# Altium PCB Xplorer_Camera.PcbDoc
Units mil, origin at the board's own origin, x right, y up, seen from the top; angles counter-clockwise.
Board outline 3270 x 2050 mil, 2 copper layers (Top Layer, Bottom Layer); 34 components, 38 nets, 138 pads, 656 vias.
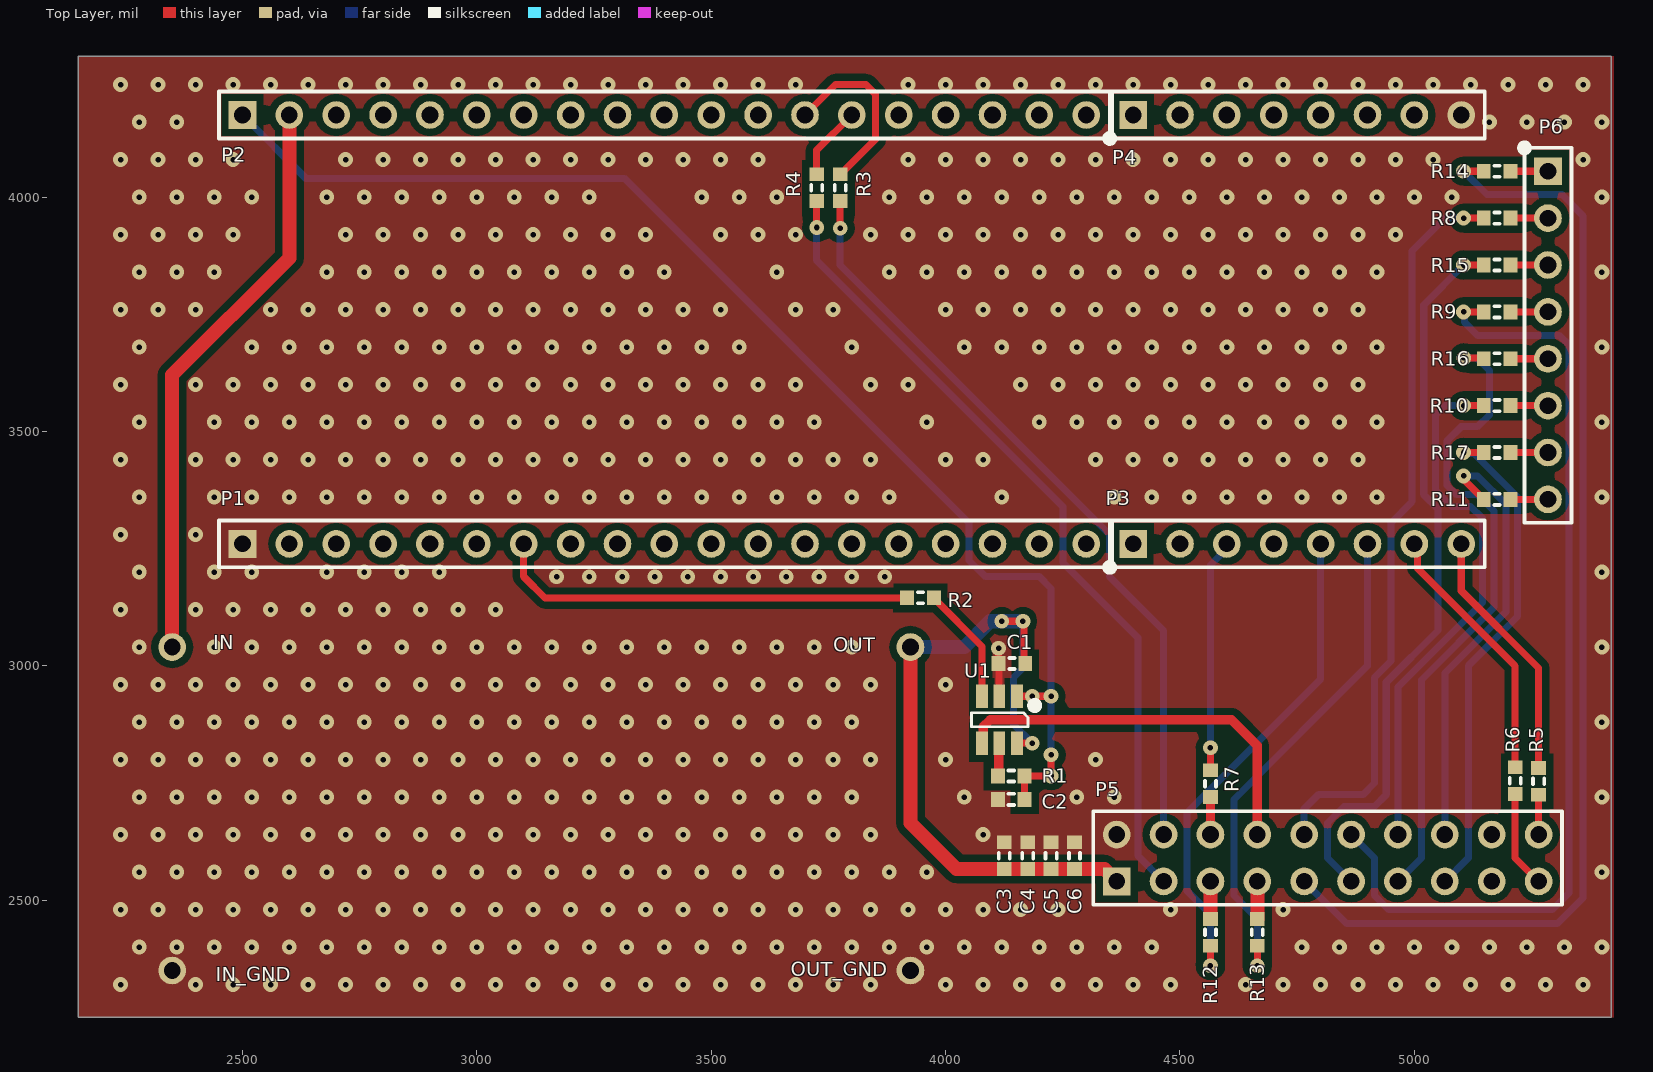
[diagram p0: Top Layer view]
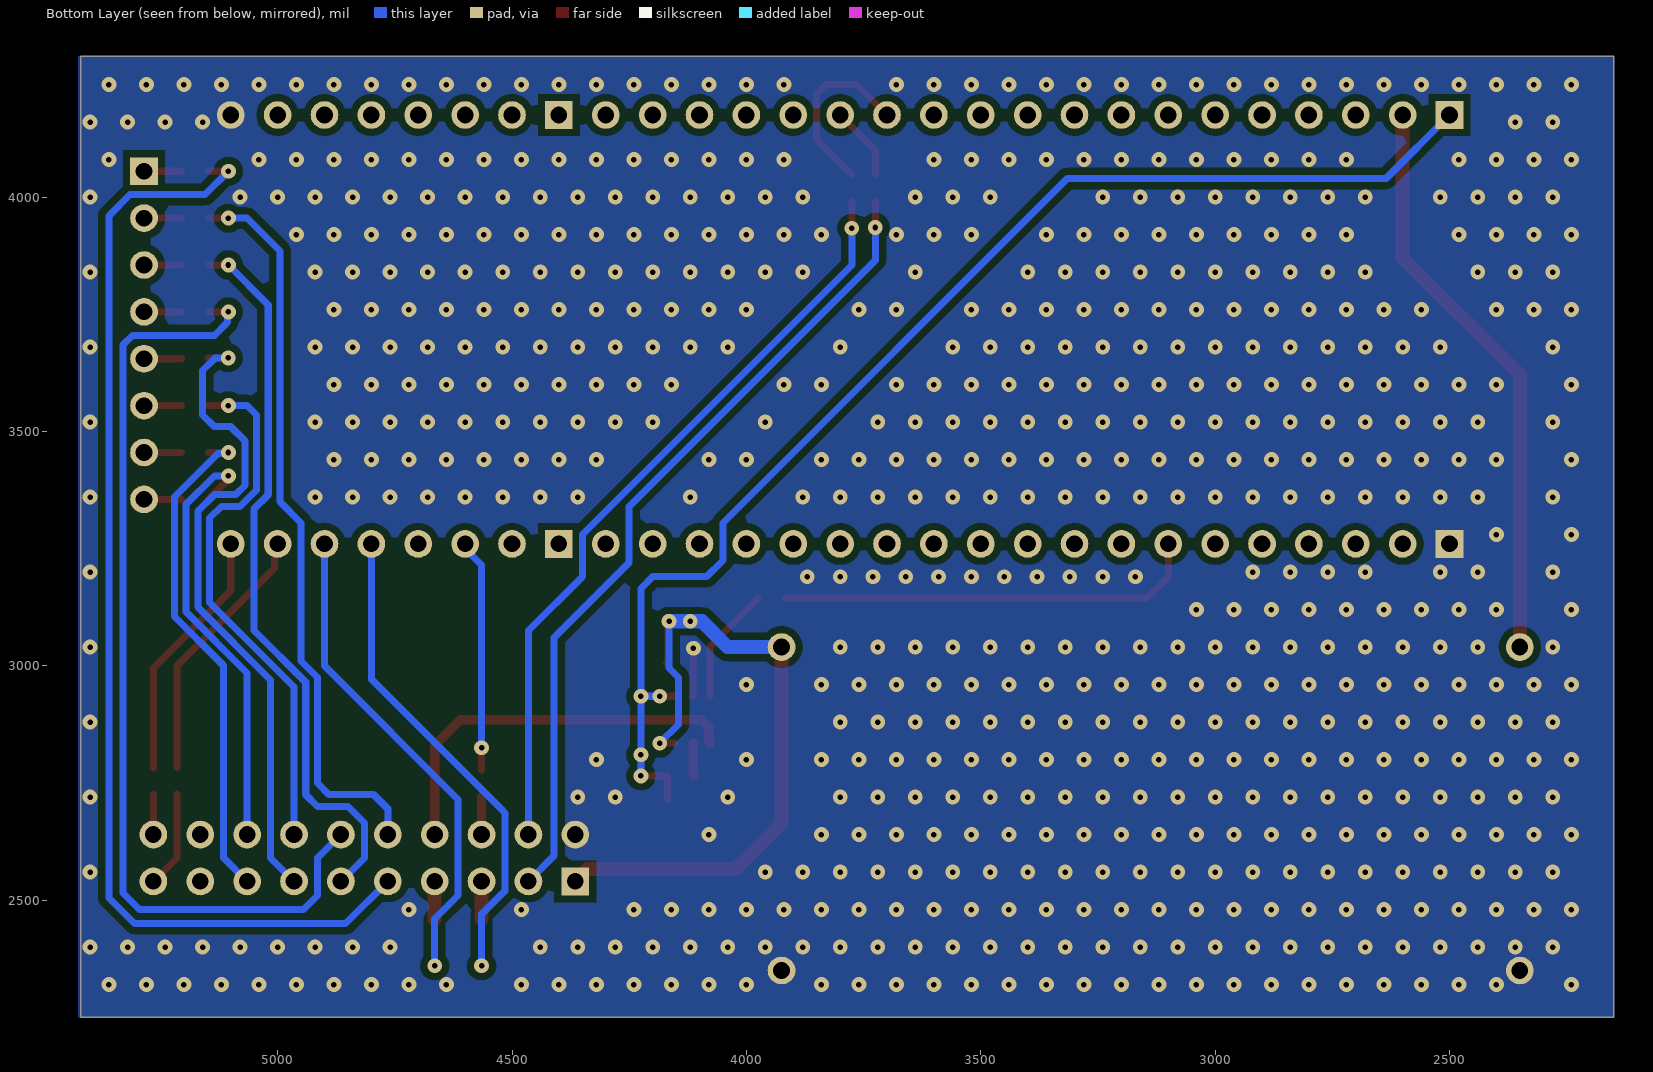
[diagram p1: Bottom Layer view, seen from below]
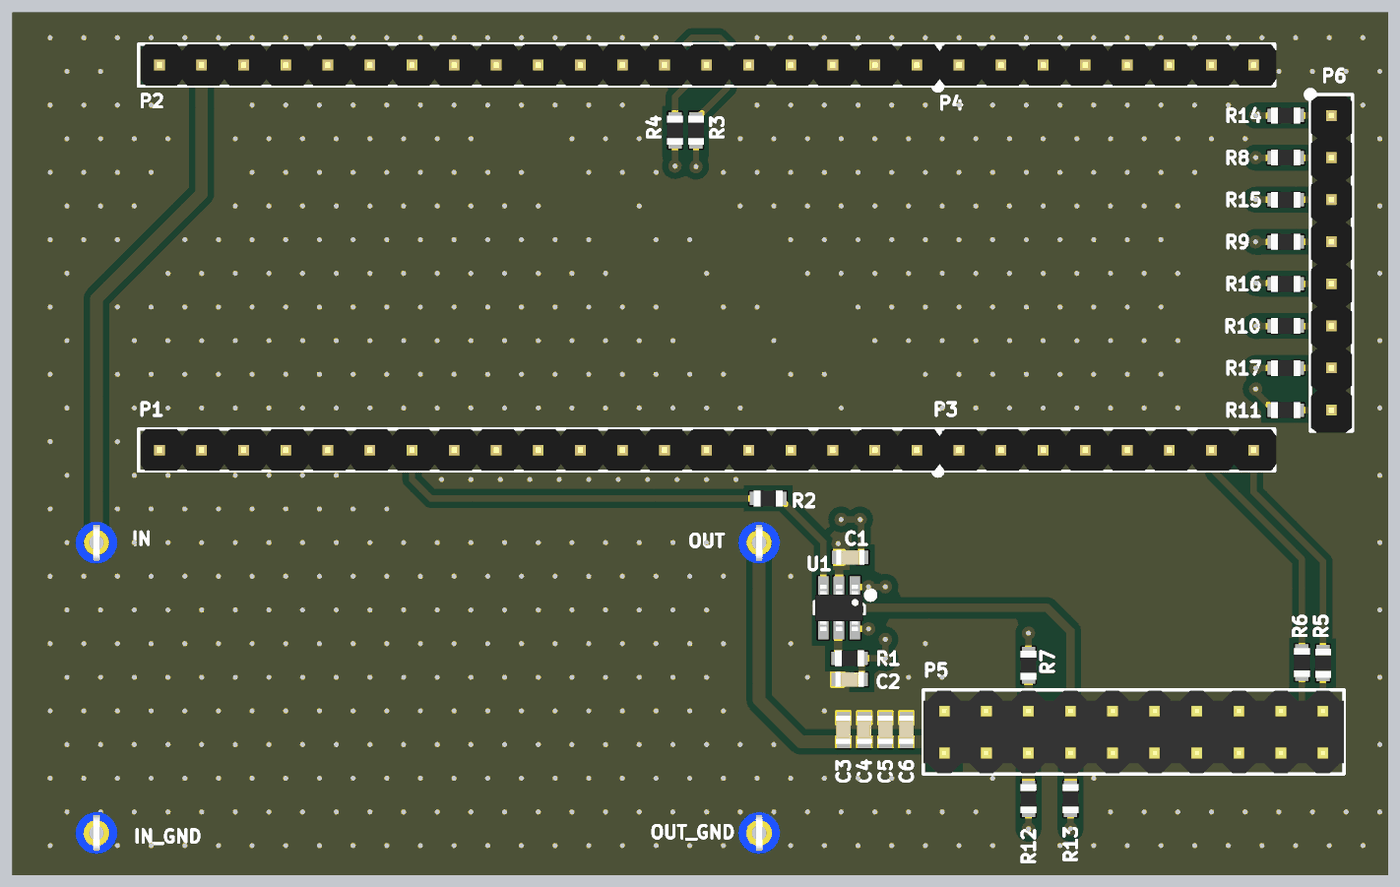
[diagram p2: 3D render of the assembled board from above, using the file's embedded part models]

## Layer stack, top to bottom
Top Solder: solder mask 0.4, Solder Resist, Dk 3.5
Top Layer: signal copper 1.4
Dielectric 1: dielectric 12.6, FR-4, Dk 4.8
Bottom Layer: signal copper 1.4
Bottom Solder: solder mask 0.4, Solder Resist, Dk 3.5

## Board outline
2150,2250 5420,2250 5420,4300 2150,4300

## Design rules (kind name [scope] priority, off if disabled: settings)
Clearance [All] p1: gap=6 ignorepadtopadclearanceinfootprint=FALSE except(15: Arc-Poly Track-Poly SMDPad-Poly THPad-Poly Via-Poly Fill-Poly Poly-Poly Poly-Region Poly-Text Poly-Hole)
ComponentClearance P1_P3 [All] p1: gap=-1 collisioncheckmode=3 verticalgap=10 showdistances=FALSE
ComponentClearance P2_P4 [InComponent('P2') vs InComponent('P4')] p2: gap=-1 collisioncheckmode=3 verticalgap=0 showdistances=FALSE
ComponentClearance [All] p3: gap=10 collisioncheckmode=3 verticalgap=10 showdistances=FALSE
DiffPairsRouting [All] p1: maxlimit=10 minlimit=6 mostfreqgap=6 toplayer_minwidth=7 toplayer_maxwidth=15 toplayer_prefwidth=7 bottomlayer_minwidth=7 bottomlayer_maxwidth=15 bottomlayer_prefwidth=7 maxuncoupledlength=500
FabricationTestPointUsage TestPointUsage [All] p1: valid=0 allowmultiple=FALSE
FabricationTestpoint Testpoint [All] p1: side=3 testpointundercomponent=TRUE minsize=40 maxsize=100 preferedsize=60 minholesize=20 maxholesize=40 preferedholesize=32 testpointgrid=1 allowsidetop=TRUE allowsidebottom=TRUE usegrid=TRUE gridtolerance=0.01
Height [All] p1: minheight=0 maxheight=3937.01 prefheight=500
HoleSize [All] p1: absolutevalues=TRUE maxlimit=393.7 minlimit=11.81 maxpercent=80.000 minpercent=20.000
MinimumAnnularRing [All] p1: minimumring=6
MinimumSolderMaskSliver [All] p1: minsoldermaskwidth=6
PlaneConnect PlaneConnect_via [IsVia] p1: planeconnectstyle=Direct reliefexpansion=20 reliefentries=4 reliefconductorwidth=10 reliefairgap=10
PlaneConnect [All] p2: planeconnectstyle=Direct reliefexpansion=20 reliefentries=4 reliefconductorwidth=10 reliefairgap=10
PolygonConnect PolygonConnect_via [IsVia] p1: connectstyle=Direct reliefconductorwidth=10 reliefentries=4 polygonreliefangle="90 Angle" airgapwidth=10
PolygonConnect [All] p2: thpad.connectstyle=Direct thpad.reliefconductorwidth=15 thpad.reliefentries=4 thpad.polygonreliefangle="45 Angle" thpad.airgapwidth=10 smdpad.connectstyle=Direct smdpad.reliefconductorwidth=15 smdpad.reliefentries=4 smdpad.polygonreliefangle="45 Angle" smdpad.airgapwidth=10 via.connectstyle=Relief via.reliefconductorwidth=15 via.reliefentries=4 via.polygonreliefangle="45 Angle" via.airgapwidth=10
RoutingVias [All] p1: holewidth=12 width=30 viastyle="Through Hole" minholewidth=11.81 minwidth=23.81 maxholewidth=787.4 maxwidth=1181.1
SilkToSolderMaskClearance [IsPad] p1: minsilkscreentomaskgap=3 clearancetoexposedcopper=TRUE
SolderMaskExpansion [All] p1: expansion=4 istentingtop=FALSE
UnRoutedNet [All] p1: checkbadconnections=TRUE
Width [All] p1: maxlimit=200 minlimit=6 preferedwidth=6
20 further rules are at their usual default settings.

## Components (designator, comment, footprint, x,y, rotation, side; value= is the part's Value field where it differs from the comment)
C1 "Ceramic X7R" C_0603_1608 4141.46,3005 r180 top value=100nF
C2 "Ceramic X7R" C_0603_1608 4140,2715 r180 top value=100nF
C3 "Ceramic X5R" C_0603_1608 4125,2595 r90 top value=10uF
C4 "Ceramic X7R" C_0603_1608 4175,2595 r90 top value=1uF
C5 "Ceramic X7R" C_0603_1608 4225,2595 r90 top value=100nF
C6 "Ceramic X7R" C_0603_1608 4275,2595 r90 top value=100nF
IN "Single pin" TP_1PIN 2350,3040 r0 top
IN_GND "Single pin" TP_1PIN 2350,2350 r0 top
OUT "Single pin" TP_1PIN 3925,3040 r0 top
OUT_GND "Single pin" TP_1PIN 3925,2350 r0 top
P1 "Goldpin" P_HEADER_1x19_2.54 2500,3260 r0 top value=DS1021-1*20SF11
P2 "Goldpin" P_HEADER_1x19_2.54 2500,4175 r0 top value=DS1021-1*20SF11
P3 "Goldpin" P_HEADER_1x8_2.54 4400,3260 r0 top value=DS1021-1*8SF1-1
P4 "Goldpin" P_HEADER_1x8_2.54 4400,4175 r0 top value=DS1021-1*8SF1-1
P5 "Goldpin male" P_HEADER_2x10_2.54 4365,2540 r0 top value=DS1021-2*10SF1-1
P6 "Goldpin" P_HEADER_1x8_2.54 5285,4055 r270 top value=DS1021-1*8SF1-1
R1 "Resistor" R_0603_1608 4140,2765 r0 top value=100R
R2 "Resistor" R_0603_1608 3946.46,3145 r0 top value=2k
R3 "Resistor" R_0603_1608 3775,4020 r270 top value=100R
R4 "Resistor" R_0603_1608 3725,4020 r270 top value=100R
R5 "Resistor" R_0603_1608 5265,2753.54 r90 top value=100R
R6 "Resistor" R_0603_1608 5215,2755 r270 top value=100R
R7 "Resistor" R_0603_1608 4565,2748.54 r90 top value=100R
R8 "Resistor" R_0603_1608 5176.46,3955 r0 top value=100R
R9 "Resistor" R_0603_1608 5176.46,3755 r0 top value=100R
R10 "Resistor" R_0603_1608 5176.46,3555 r0 top value=100R
R11 "Resistor" R_0603_1608 5176.46,3355 r0 top value=100R
R12 "Resistor" R_0603_1608 4565,2431.46 r90 top value=100R
R13 "Resistor" R_0603_1608 4665,2431.46 r90 top value=100R
R14 "Resistor" R_0603_1608 5176.46,4055 r180 top value=100R
R15 "Resistor" R_0603_1608 5176.46,3855 r180 top value=100R
R16 "Resistor" R_0603_1608 5176.46,3655 r180 top value=100R
R17 "Resistor" R_0603_1608 5176.46,3455 r180 top value=100R
U1 "Single-Bit Dual-Supply Bus Transceiver" SOT23-6_SC74A_SOT753 4115,2885 r180 top value=SN74LVC1T45DBVT

## Footprints (in the part's own frame and the unit in brackets; to place one, negate y for a bottom-side part, rotate by r counter-clockwise, add the part's x,y. Pads: shape width x height; smd on the part's side, far side on the other; paste and mask are expansions set on the pad)
C_0603_1608 [mm]
  rect 0.75x0.8 smd: 1(-0.725,0) 2(0.725,0)
  silkscreen extent -0.15,-0.3 0.15,0.3, body extent -0.85,-0.45 0.85,0.45, height 0.89
P_HEADER_1x8_2.54 [mm] "Connector; Header; 8 Position; Male"
  rect 1.5x1.5 hole 0.9: 1(0,0)
  round 1.5 hole 0.9: 2(2.54,0) 3(5.08,0) 4(7.62,0) 5(10.16,0) 6(12.7,0) 7(15.24,0) 8(17.78,0)
  silkscreen extent -1.47,-1.47 19.05,1.27, body extent -1.17,-1.25 19.15,1.25, height 8.2
P_HEADER_1x19_2.54 [mm] "Connector; Header; 19 Position; Male"
  rect 1.5x1.5 hole 0.9: 1(0,0)
  round 1.5 hole 0.9: 2(2.54,0) 3(5.08,0) 4(7.62,0) 5(10.16,0) 6(12.7,0) 7(15.24,0) 8(17.78,0) 9(20.32,0) 10(22.86,0) 11(25.4,0) 12(27.94,0) 13(30.48,0) 14(33.02,0) 15(35.56,0) 16(38.1,0) 17(40.64,0) 18(43.18,0) 19(45.72,0)
  silkscreen extent -1.27,-1.27 47.12,1.27, body extent -1.17,-1.25 47.09,1.25, height 8.2
P_HEADER_2x10_2.54 [mm] "Connector; Header"
  rect 1.5x1.5 hole 0.9: 1(0,0)
  round 1.5 hole 0.9: 2(0,2.54) 3(2.54,0) 4(2.54,2.54) 5(5.08,0) 6(5.08,2.54) 7(7.62,0) 8(7.62,2.54) 9(10.16,0) 10(10.16,2.54) 11(12.7,0) 12(12.7,2.54) 13(15.24,0) 14(15.24,2.54) 15(17.78,0) 16(17.78,2.54) 17(20.32,0) 18(20.32,2.54) 19(22.86,0) 20(22.86,2.54)
  silkscreen extent -1.27,-1.27 24.13,3.81, body extent -1.27,-1.23 24.13,3.77, height 8.4
R_0603_1608 [mm]
  rect 0.75x0.8 smd: 1(-0.725,0) 2(0.725,0)
  silkscreen extent -0.15,-0.3 0.15,0.3, body extent -0.87,-0.47 0.88,0.48, height 0.54
SOT23-6_SC74A_SOT753 [mil]
  rect 25x50 smd: 1(-37.5,-50) 2(0.5,-50) 3(37.5,-50) 4(37.5,50) 5(0.5,50) 6(-37.5,50)
  silkscreen extent -81,-36 60,15, body extent -57,-55 57,55, height 39
TP_1PIN [mm] "Testpoint; 1 Pin;"
  round 1.5 hole 0.9: 1(0,0)
  body extent -1.27,-1.27 1.27,1.27, height 4.89

## Part data
C1 C2 C5 C6: library part C_100nF_50V_X7R_0603_5, "Capacitor", Dielectric=X7R, Manufacturer=Samsung, Manufacturer Part Number=CL10B104JB8NNNC, Tolerance (%)=5, Voltage=50V, HelpURL=http://www.tme.eu/pl/Document/4a42202b32dab16128fe107dd69598cc/samsung-chip-cap.pdf, Part Number=C_100nF_50V_X7R_0603_5, SCH_Footprint=0603, Supplier 1=TME, Supplier 2="RS Components", Supplier 3=Farnell, Supplier 4=Mouser, Supplier 5=Digi-Key, Supplier 6=LCSC, Supplier Part Number 1=CL10B104JB8NNNC
C3: library part C_10uF_16V_X5R_0603_20, "Capacitor", Dielectric=X5R, Manufacturer="Samsung Electro-Mechanics", Manufacturer Part Number=CL10A106MO8NQNC, Tolerance (%)=20, Voltage=16V, HelpURL=http://www.tme.eu/pl/Document/4a42202b32dab16128fe107dd69598cc/samsung-chip-cap.pdf, Part Number=C_10uF_16V_X5R_0603_20, SCH_Footprint=0603, Supplier 1=TME, Supplier 2="RS Components", Supplier 3=Farnell, Supplier 4=Mouser, Supplier 5=Digi-Key, Supplier 6=LCSC, Supplier Part Number 1=CL10A106MO8NQNC
C4: library part C_1uF_25V_X7R_0603_10, "Capacitor", Dielectric=X7R, Manufacturer=Samsung, Manufacturer Part Number=CL10B105KA8NNNC, Tolerance (%)=10, Voltage=25V, HelpURL=http://www.tme.eu/pl/Document/4a42202b32dab16128fe107dd69598cc/samsung-chip-cap.pdf, Part Number=C_1uF_25V_X7R_0603_10, SCH_Footprint=0603, Supplier 1=TME, Supplier 2="RS Components", Supplier 3=Farnell, Supplier 4=Mouser, Supplier 5=Digi-Key, Supplier 6=LCSC, Supplier Part Number 1=CL10B105KA8NNNC
IN IN_GND OUT OUT_GND: library part TP_1PIN, "Testpoint", Part Number=TP_1PIN, SCH_Footprint=Single, Supplier 1=TME, Supplier 2="RS Components", Supplier 3=Farnell, Supplier 4=Mouser, Supplier 5=Digi-Key, Supplier 6=LCSC
P1 P2: library part P_HEADER_1x19_2.54, "Pin Header", Manufacturer=Connfly, Manufacturer Part Number=DS1021-1*20SF11, Supplier Part Number 1=ZL201-20G, HelpURL=http://www.tme.eu/pl/Document/cc301e58a5da78cb543a94b5a5b7f06a/DS1021.pdf, Part Number=P_HEADER_1x19_2.54, SCH_Footprint="1x19 2.54mm", Supplier 1=TME, Supplier 2="RS Components", Supplier 3=Farnell, Supplier 4=Mouser, Supplier 5=Digi-Key, Supplier 6=LCSC
P3 P4 P6: library part P_HEADER_1x8_2.54, "Pin Header", Manufacturer=Connfly, Manufacturer Part Number=DS1021-1*8SF1-1, Supplier Part Number 1=ZL201-08G, HelpURL=http://www.tme.eu/en/Document/cc301e58a5da78cb543a94b5a5b7f06a/DS1021.pdf, Part Number=P_HEADER_1x8_2.54, SCH_Footprint="1x8 2.54mm", Supplier 1=TME, Supplier 2="RS Components", Supplier 3=Farnell, Supplier 4=Mouser, Supplier 5=Digi-Key, Supplier 6=LCSC
P5: library part P_HEADER_2x10_2.54, "Pin Header", Manufacturer=Connfly, Manufacturer Part Number=DS1021-2*10SF1-1, Supplier Part Number 1=ZL202-20G, HelpURL=https://www.tme.eu/Document/cc301e58a5da78cb543a94b5a5b7f06a/DS1021.pdf, Part Number=P_HEADER_2x10_2.54, SCH_Footprint="2x10 2.54mm", Supplier 1=TME, Supplier 2="RS Components", Supplier 3=Farnell, Supplier 4=Mouser, Supplier 5=Digi-Key, Supplier 6=LCSC
R1 R3 R4 R5 R6 R7 R8 R9 R10 R11 R12 R13 R14 R15 R16 R17: library part R_100R_0603_1, Manufacturer=Yageo, Manufacturer Part Number=RC0603FR-07100RL, Power=100mW, Supplier Part Number 1=RC0603FR-07100R, Tolerance=1%, Voltage=50V, HelpURL=http://www.tme.eu/en/Document/d2a72e545e5c8eb7bf2a04fa97535928/rc0603yageo.pdf, Part Number=R_100R_0603_1, SCH_Footprint=0603, Supplier 1=TME, Supplier 2="RS Components", Supplier 3=Farnell, Supplier 4=Mouser, Supplier 5=Digi-Key, Supplier 6=LCSC, Supplier Part Number 3=2131804, Supplier Part Number 4=603-RC0603FR-07100RL, Supplier Part Number 5=311-100HRCT-ND
R2: library part R_2k_0603_1, Manufacturer=Yageo, Manufacturer Part Number=RC0603FR-072KL, Power=100mW, Supplier Part Number 1=RC0603FR-072K, Tolerance=1%, Voltage=50V, HelpURL=http://datasheet.octopart.com/RC0603FR-072KL-Yageo-datasheet-8328172.pdf, Part Number=R_2k_0603_1, SCH_Footprint=0603, Supplier 1=TME, Supplier 2="RS Components", Supplier 3=Farnell, Supplier 4=Mouser, Supplier 5=Digi-Key, Supplier 6=LCSC, Supplier Part Number 4=603-RC0603FR-072KL, Supplier Part Number 5=311-2.00KHRCT-ND
U1: library part U_SN74LVC1T45DBVT, "This single-bit noninverting bus transceiver uses two separate configurable power-supply rails.  VCCA and VCCB accepts any supply voltage from 1.65 V to 5.5 V. DIR low B->A, DIR high A->B", Manufacturer="Texas Instruments", Manufacturer Part Number=SN74LVC1T45DBVT, HelpURL=http://www.ti.com/lit/ds/symlink/sn74lvc1t45.pdf, Part Number=U_SN74LVC1T45DBVT, SCH_Footprint=SOT23-6, Supplier 1=TME, Supplier 2="RS Components", Supplier 3=Farnell, Supplier 4=Mouser, Supplier 5=Digi-Key, Supplier 6=LCSC, Supplier Part Number 1=SN74LVC1T45DBVT, Supplier Part Number 2=6628825P, Supplier Part Number 3=1470916, Supplier Part Number 4=595-SN74LVC1T45DBVT, Supplier Part Number 5=296-30381-1-ND

## Via types
v1: diameter 31.5, hole 11.81, Top Layer to Bottom Layer, tented both sides, 656 vias

## Nets (pads, with @x,y where several pads share a name; then routed paths per layer and width w, separated by ;. In a path a pad name is that pad's centre, name@x,y a point inside that pad or via, vN(x,y) a via of type N, cw(c..) or ccw(c..) an arc to the next point about the centre after c; other vN are vias at no path point)
+3.3V: C1.1 C3.1 C4.1 C5.1 C6.1 OUT.1 P5.1 U1.6 | length 1584.1
  Top Layer w15: v1(4120,3095) v1(4165,3095) 4167.5,3092.5 4167.5,3007.5 C1.1 ; U1.6 v1(4185,2835)
  Top Layer w30: OUT.1 3925,2665 4023.54,2566.46 C3.1 C4.1 C5.1 C6.1 4338.54,2566.46 P5.1
  Bottom Layer w15: v1(4165,3095) 4165,2995 4145,2975 4145,2875 v1(4185,2835)
  Bottom Layer w30: OUT.1 4040,3040 4095,3095 v1(4120,3095) v1@4164.71,3095 ; v1@4164.71,3094.71 v1(4165,3095)
+3.3V_LPC: C2.1 P2.1 R1.2 U1.1 | length 2854.2
  Top Layer w15: U1.1 v1(4185,2935) v1(4225,2935) ; C2.1 R1.2 v1(4225,2765) v1(4225,2810)
  Bottom Layer w15: P2.1 2635,4040 3315,4040 4050,3305 4050,3225 4085,3190 4200,3190 4225,3165 v1(4225,2935) ; v1(4185,2935) v1(4225,2935) ; v1(4225,2765) v1(4225,2810) v1(4225,2935)
+5.0V: IN.1 P2.2 | length 1238.6
  Top Layer w30: IN.1 2350,3620 2600,3870 P2.2
D0: P6.8 R11.2 | length 80
  Top Layer w15: R11.2 P6.8
D1: P6.7 R17.1 | length 80
  Top Layer w15: R17.1 P6.7
D2: P6.6 R10.2 | length 80
  Top Layer w15: R10.2 P6.6
D3: P6.5 R16.1 | length 80
  Top Layer w15: R16.1 P6.5
D4: P6.4 R9.2 | length 80
  Top Layer w15: R9.2 P6.4
D5: P6.3 R15.1 | length 80
  Top Layer w15: R15.1 P6.3
D6: P6.2 R8.2 | length 80
  Top Layer w15: R8.2 P6.2
D7: P6.1 R14.1 | length 80
  Top Layer w15: R14.1 P6.1
GND: C1.2 C2.2 C3.2 C4.2 C5.2 C6.2 IN_GND.1 OUT_GND.1 P1.1 P4.8 P5.2 U1.2 | length 103.2
  Top Layer w15: v1(4112.91,3037.5) C1.2 4113.71,3004.21 4113.71,2935.79 U1.2
  other v1: 2240,2320 2400,2320 2480,2320 2560,2320 2640,2320 2720,2320 2800,2320 2880,2320 2960,2320 3040,2320 3120,2320 3200,2320 3280,2320 3360,2320 3440,2320 3520,2320 3600,2320 3680,2320 3760,2320 3840,2320 4000,2320 4080,2320 4160,2320 4240,2320 4320,2320 4400,2320 4480,2320 4640,2320 4720,2320 4800,2320 4880,2320 4960,2320 5040,2320 5120,2320 5200,2320 5280,2320 5360,2320 2280,2400 2360,2400 2440,2400 2520,2400 2600,2400 2680,2400 2760,2400 2840,2400 2920,2400 3000,2400 3080,2400 3160,2400 3240,2400 3320,2400 3400,2400 3480,2400 3560,2400 3640,2400 3720,2400 3800,2400 3880,2400 3960,2400 4040,2400 4120,2400 4200,2400 4280,2400 4360,2400 4440,2400 4760,2400 4840,2400 4920,2400 5000,2400 5080,2400 5160,2400 5240,2400 5320,2400 5400,2400 2240,2480 2320,2480 2400,2480 2480,2480 2560,2480 2640,2480 2720,2480 2800,2480 2880,2480 2960,2480 3040,2480 3120,2480 3200,2480 3280,2480 3360,2480 3440,2480 3520,2480 3600,2480 3680,2480 3760,2480 3840,2480 3920,2480 4000,2480 4080,2480 4160,2480 4240,2480 4480,2480 4720,2480 2280,2560 2360,2560 2440,2560 2520,2560 2600,2560 2680,2560 2760,2560 2840,2560 2920,2560 3000,2560 3080,2560 3160,2560 3240,2560 3320,2560 3400,2560 3480,2560 3560,2560 3640,2560 3720,2560 3800,2560 3880,2560 3960,2560 5400,2560 2240,2640 2320,2640 2400,2640 2480,2640 2560,2640 2640,2640 2720,2640 2800,2640 2880,2640 2960,2640 3040,2640 3120,2640 3200,2640 3280,2640 3360,2640 3440,2640 3520,2640 3600,2640 3680,2640 3760,2640 3840,2640 4080,2640 2280,2720 2360,2720 2440,2720 2520,2720 2600,2720 2680,2720 2760,2720 2840,2720 2920,2720 3000,2720 3080,2720 3160,2720 3240,2720 3320,2720 3400,2720 3480,2720 3560,2720 3640,2720 3720,2720 3800,2720 4040,2720 4280,2720 4360,2720 5400,2720 2240,2800 2320,2800 2400,2800 2480,2800 2560,2800 2640,2800 2720,2800 2800,2800 2880,2800 2960,2800 3040,2800 3120,2800 3200,2800 3280,2800 3360,2800 3440,2800 3520,2800 3600,2800 3680,2800 3760,2800 3840,2800 4000,2800 4320,2800 2280,2880 2360,2880 2440,2880 2520,2880 2600,2880 2680,2880 2760,2880 2840,2880 2920,2880 3000,2880 3080,2880 3160,2880 3240,2880 3320,2880 3400,2880 3480,2880 3560,2880 3640,2880 3720,2880 3800,2880 5400,2880 2240,2960 2320,2960 2400,2960 2480,2960 2560,2960 2640,2960 2720,2960 2800,2960 2880,2960 2960,2960 3040,2960 3120,2960 3200,2960 3280,2960 3360,2960 3440,2960 3520,2960 3600,2960 3680,2960 3760,2960 3840,2960 4000,2960 2280,3040 2440,3040 2520,3040 2600,3040 2680,3040 2760,3040 2840,3040 2920,3040 3000,3040 3080,3040 3160,3040 3240,3040 3320,3040 3400,3040 3480,3040 3560,3040 3640,3040 3720,3040 3800,3040 5400,3040 2240,3120 2400,3120 2480,3120 2560,3120 2640,3120 2720,3120 2800,3120 2880,3120 2960,3120 3040,3120 3170,3190 3240,3190 3310,3190 3380,3190 3450,3190 3520,3190 3590,3190 3660,3190 3730,3190 3800,3190 3870,3190 2280,3200 2440,3200 2520,3200 2680,3200 2760,3200 2840,3200 2920,3200 5400,3200 2240,3280 2400,3280 2280,3360 2440,3360 2520,3360 2600,3360 2680,3360 2760,3360 2840,3360 2920,3360 3000,3360 3080,3360 3160,3360 3240,3360 3320,3360 3400,3360 3480,3360 3560,3360 3640,3360 3720,3360 3800,3360 3880,3360 4120,3360 4360,3360 4440,3360 4520,3360 4600,3360 4680,3360 4760,3360 4840,3360 4920,3360 5400,3360 2240,3440 2400,3440 2480,3440 2560,3440 2640,3440 2720,3440 2800,3440 2880,3440 2960,3440 3040,3440 3120,3440 3200,3440 3280,3440 3360,3440 3440,3440 3520,3440 3600,3440 3680,3440 3760,3440 3840,3440 4000,3440 4080,3440 4320,3440 4400,3440 4480,3440 4560,3440 4640,3440 4720,3440 4800,3440 4880,3440 2280,3520 2440,3520 2520,3520 2600,3520 2680,3520 2760,3520 2840,3520 2920,3520 3000,3520 3080,3520 3160,3520 3240,3520 3320,3520 3400,3520 3480,3520 3560,3520 3640,3520 3720,3520 3960,3520 4200,3520 4280,3520 4360,3520 4440,3520 4520,3520 4600,3520 4680,3520 4760,3520 4840,3520 4920,3520 5400,3520 2240,3600 2400,3600 2480,3600 2560,3600 2640,3600 2720,3600 2800,3600 2880,3600 2960,3600 3040,3600 3120,3600 3200,3600 3280,3600 3360,3600 3440,3600 3520,3600 3600,3600 3680,3600 3840,3600 3920,3600 4160,3600 4240,3600 4320,3600 4400,3600 4480,3600 4560,3600 4640,3600 4720,3600 4800,3600 4880,3600 2280,3680 2520,3680 2600,3680 2680,3680 2760,3680 2840,3680 2920,3680 3000,3680 3080,3680 3160,3680 3240,3680 3320,3680 3400,3680 3480,3680 3560,3680 3800,3680 4040,3680 4120,3680 4200,3680 4280,3680 4360,3680 4440,3680 4520,3680 4600,3680 4680,3680 4760,3680 4840,3680 4920,3680 5400,3680 2240,3760 2320,3760 2400,3760 2560,3760 2640,3760 2720,3760 2800,3760 2880,3760 2960,3760 3040,3760 3120,3760 3200,3760 3280,3760 3360,3760 3440,3760 3520,3760 3680,3760 3760,3760 4000,3760 4080,3760 4160,3760 4240,3760 4320,3760 4400,3760 4480,3760 4560,3760 4640,3760 4720,3760 4800,3760 4880,3760 2280,3840 2360,3840 2440,3840 2680,3840 2760,3840 2840,3840 2920,3840 3000,3840 3080,3840 3160,3840 3240,3840 3320,3840 3400,3840 3640,3840 3880,3840 3960,3840 4040,3840 4120,3840 4200,3840 4280,3840 4360,3840 4440,3840 4520,3840 4600,3840 4680,3840 4760,3840 4840,3840 4920,3840 5400,3840 2240,3920 2320,3920 2400,3920 2480,3920 2720,3920 2800,3920 2880,3920 2960,3920 3040,3920 3120,3920 3200,3920 3280,3920 3360,3920 3520,3920 3600,3920 3680,3920 3840,3920 3920,3920 4000,3920 4080,3920 4160,3920 4240,3920 4320,3920 4400,3920 4480,3920 4560,3920 4640,3920 4720,3920 4800,3920 4880,3920 4960,3920 2280,4000 2360,4000 2440,4000 2520,4000 2680,4000 2760,4000 2840,4000 2920,4000 3000,4000 3080,4000 3160,4000 3240,4000 3480,4000 3560,4000 3640,4000 3880,4000 3960,4000 4040,4000 4120,4000 4200,4000 4280,4000 4360,4000 4440,4000 4520,4000 4600,4000 4680,4000 4760,4000 4840,4000 4920,4000 5000,4000 5080,4000 5400,4000 2240,4080 2320,4080 2400,4080 2480,4080 2720,4080 2800,4080 2880,4080 2960,4080 3040,4080 3120,4080 3200,4080 3280,4080 3360,4080 3440,4080 3520,4080 3600,4080 3920,4080 4000,4080 4080,4080 4160,4080 4240,4080 4320,4080 4400,4080 4480,4080 4560,4080 4640,4080 4720,4080 4800,4080 4880,4080 4960,4080 5040,4080 5360,4080 2280,4160 2360,4160 5160,4160 5240,4160 5320,4160 5400,4160 2240,4240 2320,4240 2400,4240 2480,4240 2560,4240 2640,4240 2720,4240 2800,4240 2880,4240 2960,4240 3040,4240 3120,4240 3200,4240 3280,4240 3360,4240 3440,4240 3520,4240 3600,4240 3680,4240 3920,4240 4000,4240 4080,4240 4160,4240 4240,4240 4320,4240 4400,4240 4480,4240 4560,4240 4640,4240 4720,4240 4800,4240 4880,4240 4960,4240 5040,4240 5120,4240 5200,4240 5280,4240 5360,4240
HREF: P3.3 R7.2 | length 497.4
  Top Layer w15: R7.2 v1(4565,2825)
  Bottom Layer w15: v1(4565,2825) 4565,3215.11 4600,3250.11 P3.3
NetP1_7: P1.7 R2.1 | length 906.6
  Top Layer w15: P1.7 3100,3190 3145,3145 R2.1
NetP2_13: P2.13 R3.1 | length 388.3
  Top Layer w15: P2.13 3765,4240 3830,4240 3850,4220 3850,4122.56 3775.98,4048.54 R3.1
NetP2_14: P2.14 R4.1 | length 157.5
  Top Layer w15: R4.1 3725,4100 P2.14
NetP5_5: P5.5 R12.2 | length 80
  Top Layer w30: R12.2 P5.5
NetP5_6: P5.6 R7.1 | length 80
  Top Layer w20: P5.6 R7.1
NetP5_7: P5.7 R13.2 | length 80
  Top Layer w30: R13.2 P5.7
NetP5_9: P5.9 R14.2 | length 2447.3
  Top Layer w15: v1(5105,4055) R14.2
  Bottom Layer w15: P5.9 4855,2450 5305,2450 5360,2505 5360,3960 5315,4005 5155,4005 v1(5105,4055)
NetP5_10: P5.10 R8.1 | length 1577.8
  Top Layer w15: v1(5105,3955) R8.1
  Bottom Layer w15: P5.10 4765,2695 4795,2725 4890,2725 4915,2750 4915,2975 4950,3010 4950,3305 4995,3350 4995,3885 5065,3955 v1(5105,3955)
NetP5_11: P5.11 R15.2 | length 1561.7
  Top Layer w15: v1(5105,3855) R15.2
  Bottom Layer w15: P5.11 4815,2590 4815,2665 4850,2700 4915,2700 4940,2725 4940,2965 5050,3075 5050,3335 5020,3365 5020,3770 v1(5105,3855)
NetP5_12: P5.12 R9.1 | length 2071.3
  Top Layer w15: v1(5105,3755) R9.1
  Bottom Layer w15: P5.12 4915,2590 4915,2510 4945,2480 5295,2480 5330,2515 5330,3685 5310,3705 5135,3705 5107.05,3732.95 5107.05,3752.95 v1(5105,3755)
NetP5_13: P5.13 R16.2 | length 1409.1
  Top Layer w15: v1(5105.47,3656.87) R16.2@5148.38,3656.87
  Bottom Layer w15: P5.13 5015,2590 5015,2970 5170,3125 5170,3330 5135,3365 5090,3365 5070,3385 5070,3480 5100,3510 5135,3510 5160,3535 5160,3630 5133.13,3656.87 v1(5105.47,3656.87)
NetP5_14: P5.14 R10.1 | length 1145.6
  Top Layer w15: v1(5105,3555) R10.1
  Bottom Layer w15: P5.14 4965,2955 5145,3135 5145,3315 5120,3340 5080,3340 5045,3375 5045,3535 5065,3555 v1(5105,3555)
NetP5_15: P5.15 R17.2 | length 1081.5
  Top Layer w15: v1(5105,3455) R17.2
  Bottom Layer w15: P5.15 5115,2590 5115,3000 5220,3105 5220,3360 5127.05,3452.95 5107.05,3452.95 v1(5105,3455)
NetP5_16: P5.16 R11.1 | length 941.5
  Top Layer w15: v1(5105,3405) 5105,3397.91 R11.1
  Bottom Layer w15: P5.16 5065,2985 5195,3115 5195,3345 5135,3405 v1(5105,3405)
NetP5_19: P5.19 R6.2 | length 207.2
  Top Layer w15: R6.2 5215,2590 P5.19
NetP5_20: P5.20 R5.1 | length 85
  Top Layer w15: P5.20 R5.1
NetR1_1: R1.1 U1.5 | length 71.3
  Top Layer w20: R1.1 4112.98,2766.52 4112.98,2833.48 U1.5
NetR2_2: R2.2 U1.3 | length 252.5
  Top Layer w15: R2.2 3975,3144.02 4077.5,3041.52 U1.3
PCLK: P3.6 R13.1 | length 1081.7
  Top Layer w15: v1(4665,2360) R13.1
  Bottom Layer w15: v1(4665,2360) 4665,2460 4615,2510 4615,2715 4900,3000 P3.6
PWDN: P3.8 R5.2 | length 546.3
  Top Layer w15: P3.8 5100,3160 5265,2995 R5.2
RST: P3.7 R6.1 | length 565.5
  Top Layer w15: P3.7 5007.03,3252.97 5007.03,3207.97 5215,3000 R6.1
SCL: P5.3 R4.2 | length 1758
  Top Layer w15: v1(3725,3935) R4.2
  Bottom Layer w15: v1(3725,3935) 3725,3865 4250,3340 4250,3220 4410,3060 4410,2595 P5.3
SDA: P5.4 R3.2 | length 1638.7
  Top Layer w15: v1(3775,3933.54) R3.2
  Bottom Layer w15: v1@3775,3935 3775,3855 4350,3280 4350,3190 4465,3075 P5.4
VSYNC: P3.5 R12.1 | length 1081.7
  Top Layer w15: v1(4565,2360) R12.1
  Bottom Layer w15: v1(4565,2360) 4565,2470 4515,2520 4515,2686.21 4523.79,2695 4800,2971.21 P3.5
XCLK: P5.8 U1.4 | length 840
  Top Layer w20: U1.4 4080,2837.5 4080,2870 4095,2885 4610,2885 4665,2830 P5.8
pads on no net: P1.2 P1.3 P1.4 P1.5 P1.6 P1.8 P1.9 P1.10 P1.11 P1.12 P1.13 P1.14 P1.15 P1.16 P1.17 P1.18 P1.19 P2.3 P2.4 P2.5 P2.6 P2.7 P2.8 P2.9 P2.10 P2.11 P2.12 P2.15 P2.16 P2.17 P2.18 P2.19 P3.1 P3.2 P3.4 P4.1 P4.2 P4.3 P4.4 P4.5 P4.6 P4.7 P5.17 P5.18

## Polygon pours and split planes (outlines as drawn)
GND on Top Layer "NONET_L02_P-001" (solid, remove dead copper, pour order 0): 2150,4300 5425,4300 5425,2250 2150,2250
GND on Bottom Layer "NONET_L02_P-001" (solid, remove dead copper, pour order 1): 2150,4300 5425,4300 5425,2250 2150,2250

## Silkscreen, mask and mechanical layers (free items; w line width, h text height)
Mechanical 1:
  the board outline again, w6